# Altium PCB LDO_SOT-23-5.pcbdoc
Units mm, origin at the board's own origin, x right, y up, seen from the top; angles counter-clockwise.
Board outline 16.03 x 16.3 mm, 2 copper layers (Top Layer, Bottom Layer); 1 components, 0 nets, 5 pads, 0 vias.
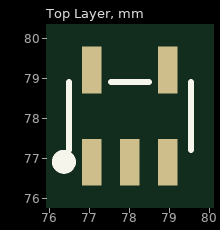
[diagram p0: Top Layer view]
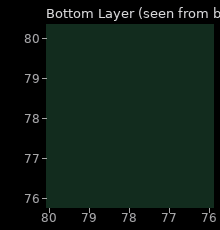
[diagram p1: Bottom Layer view, seen from below]

## Layer stack, top to bottom
Top Layer: signal copper (thickness not stored)
Dielectric: dielectric 0.32, FR-4, Dk 4.8
Bottom Layer: signal copper (thickness not stored)

## Board outline
85.877,69.85 69.85,69.85 69.85,86.154 85.877,86.154

## Components (designator, comment, footprint, x,y, rotation, side; value= is the part's Value field where it differs from the comment)
? "SOT-23-5_L3.0-W1.7-P0.95-LS2.8-BL" SOT-23-5_L3.0-W1.7-P0.95-LS2.8-BL 78.001,78.063 r0 top

## Footprints (in the part's own frame and the unit in brackets; to place one, negate y for a bottom-side part, rotate by r counter-clockwise, add the part's x,y. Pads: shape width x height; smd on the part's side, far side on the other; paste and mask are expansions set on the pad)
SOT-23-5_L3.0-W1.7-P0.95-LS2.8-BL [mm]
  rect 0.49x1.157 smd: 1(-0.95,-1.154) 2(0,-1.154) 3(0.95,-1.154)
  rect 0.49x1.175 smd: 4(0.95,1.154) 5(-0.95,1.154)
  silkscreen extent -1.8,-1.29 1.53,0.85

## Nets (pads, with @x,y where several pads share a name; then routed paths per layer and width w, separated by ;. In a path a pad name is that pad's centre, name@x,y a point inside that pad or via, vN(x,y) a via of type N, cw(c..) or ccw(c..) an arc to the next point about the centre after c; other vN are vias at no path point)
pads on no net: ?.1 ?.2 ?.3 ?.4 ?.5